# Altium PCB 风扇_V1.9.PcbDoc
Units mm, origin at the board's own origin, x right, y up, seen from the top; angles counter-clockwise.
Board outline 21 x 121 mm, 2 copper layers (Top Layer, Bottom Layer); 73 components, 53 nets, 228 pads, 116 vias.
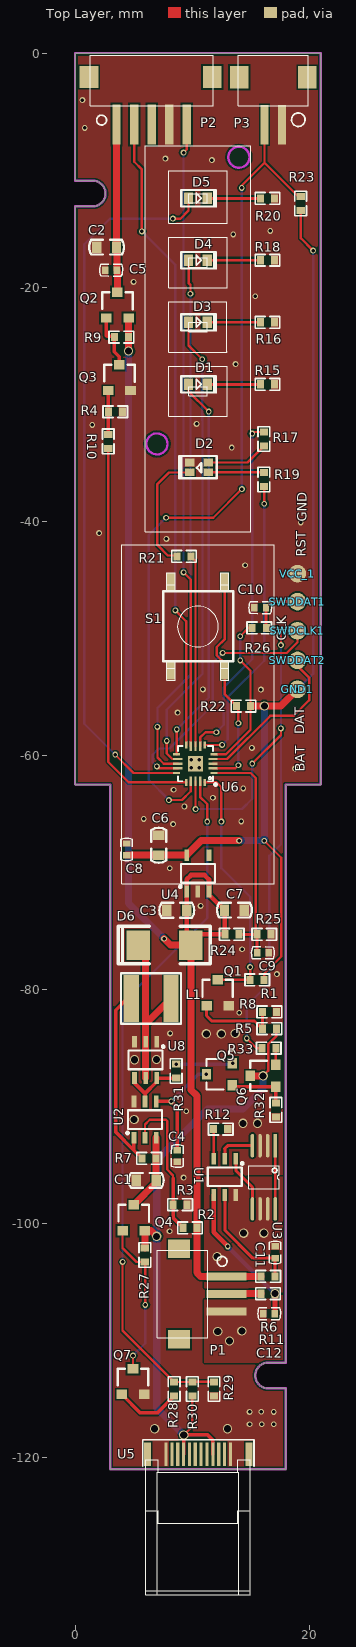
[diagram p0: Top Layer view]
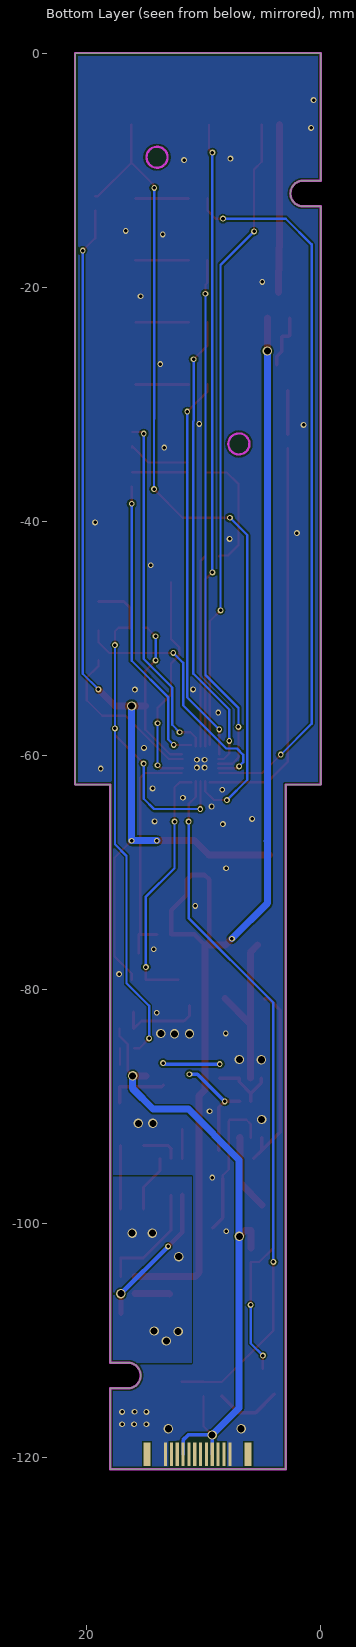
[diagram p1: Bottom Layer view, seen from below]

## Layer stack, top to bottom
Top Layer: signal copper 0.0356
Dielectric: dielectric 0.32, FR-4, Dk 4.8
Bottom Layer: signal copper 0.0356

## Board outline
0,-62.5 0,-13.1 1.5,-13.1 ccw(c1.5,-12) 1.5,-10.9 0,-10.9 0,0 21,0 21,-62.5 18,-62.5 18,-111.9 16.5,-111.9 ccw(c16.5,-113) 16.5,-114.1 18,-114.1 18,-121 3,-121 3,-62.5

## Design rules (kind name [scope] priority, off if disabled: settings)
Clearance [All] p1: gap=0.15
FabricationTestPointUsage TestPointUsage [All] p1: valid=0 allowmultiple=FALSE
FabricationTestpoint Testpoint [(IsPad And (OnTopLayer Or OnBottomLayer))] p1: side=3 testpointundercomponent=TRUE minsize=1.016 maxsize=2.54 preferedsize=1.524 minholesize=0 maxholesize=1.016 preferedholesize=0.813 testpointgrid=0.025 allowsidetop=TRUE allowsidebottom=TRUE usegrid=TRUE gridtolerance=0
PlaneConnect [All] p1: planeconnectstyle=Direct reliefexpansion=0.508 reliefentries=4 reliefconductorwidth=0.254 reliefairgap=0.254
PolygonConnect [All] p1: connectstyle=Direct reliefconductorwidth=0.254 reliefentries=4 polygonreliefangle="90 Angle"
RoutingVias [All] p1: holewidth=0.3 width=0.5 viastyle="Through Hole" minholewidth=0.3 minwidth=0.5 maxholewidth=0.711 maxwidth=1.27
SilkscreenOverComponentPads [All] p1: minsilkscreentomaskgap=0.254
SolderMaskExpansion [All] p1: expansion=0.102
Width [All] p1: maxlimit=1 minlimit=0.15 preferedwidth=0.254
24 further rules are at their usual default settings.

## Components (designator, comment, footprint, x,y, rotation, side; value= is the part's Value field where it differs from the comment)
C1 "47uF" C-0603 6.078,-96.324 r180 top
C2 "22uF" C-0603 2.692,-16.589 r0 top
C3 "47uF" C-0603 8.689,-73.246 r0 top
C4 "4.7uF" C-0402 8.738,-94.237 r270 top
C5 "1uF" C-0402 3.073,-18.55 r0 top
C6 "22uF" C-0603 7.15,-67.691 r270 top
C7 "22uF" C-0603 13.619,-73.233 r180 top
C8 "1uF" C-0402 4.402,-68.039 r270 top
C9 "1uF" C-0402 16.06,-76.881 r180 top
C10 "0.1uF" C-0402 15.811,-47.391 r0 top
C11 "1uF" C-0402 17.092,-102.474 r270 top
C12 "1uF" C-0402 16.576,-107.729 r0 top
D1 "LED0" LED-0603 11.857,-28.984 r180 top
D2 "RGB-GND" 0603*2-LED 9.794,-35.834 r0 top
D3 "LED0" LED-0603 11.857,-23.684 r180 top
D4 "LED0" LED-0603 11.857,-18.384 r180 top
D5 "LED0" LED-0603 11.857,-13.084 r180 top
D6 "SS34" DSMD 9.898,-76.225 r180 top
GND1 "TP" TP-1.5 19.002,-54.369 r90 top
L1 "10uH" L-SMD 6.495,-80.772 r180 top
P1 "TU1501WNR-3PS-VOID-C0-NL-A" TU1501WNR-3PS-VOID-*-NL-A 11.318,-102.284 r270 top
P2 "TU1501WNR-5PS-VOID-C0-NL-A" TU1501WNR-5PS-VOID-*-NL-A 1.3,-4.483 r0 top
P3 "TU1501WNR-2PS-VOID-C0-NL-A" TU1501WNR-2PS-VOID-*-NL-A 19.939,-4.501 r180 top
Q1 "8050" SOT-23 12.183,-79.195 r0 top
Q2 "BM2301" SOT-23 3.62,-20.439 r0 top
Q3 "8050" SOT-23 3.787,-26.638 r0 top
Q4 "BM2301" SOT-23 5.014,-98.417 r0 top
Q5 "8550" SOT-23 11.227,-87.259 r90 top
Q6 "8050" SOT-23 14.958,-87.391 r90 top
Q7 "8050" SOT-23 4.95,-112.415 r0 top
R1 "10K" R-0402 15.436,-79.197 r0 top
R2 "60K" R-0402 9.944,-100.381 r180 top
R3 "10K" R-0402 8.847,-98.407 r0 top
R4 "10K" R-0402 3.564,-30.651 r180 top
R5 "1K" R-0402 16.728,-83.368 r180 top
R6 "330R" R-0402 16.624,-104.539 r180 top
R7 "60mR" R-0402 6.2,-94.45 r0 top
R8 "1K" R-0402 16.474,-81.928 r0 top
R9 "470K" R-0402 3.833,-24.272 r0 top
R10 "4.7K" R-0402 2.837,-33.304 r90 top
R11 "330R" R-0402 16.609,-106.009 r180 top
R12 "2K" R-0402 12.573,-91.948 r180 top
R15 "500R" R-0402 16.309,-28.304 r0 top
R16 "500R" R-0402 16.309,-23.004 r0 top
R17 "500R" R-0402 16.142,-32.855 r270 top
R18 "500R" R-0402 16.309,-17.704 r0 top
R19 "500R" R-0402 16.142,-36.558 r90 top
R20 "500R" R-0402 16.309,-12.418 r0 top
R21 "500R" R-0402 9.428,-43.012 r180 top
R22 "47K" R-0402 14.265,-55.799 r0 top
R23 "47K" R-0402 19.279,-12.72 r270 top
R24 "1M" R-0402 13.264,-75.301 r0 top
R25 "500K" R-0402 16.035,-75.301 r0 top
R26 "47K" R-0402 15.864,-49.119 r180 top
R27 "10k" R-0402 5.961,-102.824 r90 top
R28 "10K" R-0402 8.461,-114.28 r90 top
R29 "20k" R-0402 11.872,-114.021 r270 top
R30 "10K" R-0402 10.025,-114.28 r90 top
R31 "10K" R-0402 8.639,-87.112 r90 top
R32 "10K" R-0402 17.165,-90.432 r90 top
R33 "10K" R-0402 16.429,-85.029 r0 top
S1 "SW-PB" SWITCH-4P-SMT 13.525,-45.975 r270 top
SWDCLK1 "TP" TP-1.5 19.002,-49.362 r90 top
SWDDAT1 "TP" TP-1.5 19.002,-46.868 r90 top
SWDDAT2 "TP" TP-1.5 19.002,-51.897 r90 top
U1 "HY2120-CB" SOT-23-6L 12.791,-96.022 r180 top
U2 "HM4033" SOT-23-6L 5.979,-91.135 r0 top
U3 "8205A" TSSOP8 17.104,-93.363 r270 top
U4 "TPS76033" SOT-23-5 10.493,-70.086 r0 top
U5 "USB Type-C" "USB-type C" 10.523,-119.72 r0 top
U6 "N76E003AQ20" "QFN-20 0.4mm" 10.286,-60.719 r90 top
U8 "HM8205-6" SOT-23-6L 6.03,-86.035 r180 top
VCC_1 "TP" TP-1.5 19.002,-44.486 r90 top

## Footprints (in the part's own frame and the unit in brackets; to place one, negate y for a bottom-side part, rotate by r counter-clockwise, add the part's x,y. Pads: shape width x height; smd on the part's side, far side on the other; paste and mask are expansions set on the pad)
0603*2-LED [mm]
  rect 0.8x0.65 smd: 1(1.6,0.85) 2(1.6,0) 3(0,0) 4(0,0.85)
  silkscreen extent -0.9,-0.5 2.3,1.4
C-0402 [mm]
  rect 0.55x0.65 smd: 1(-0.5,0) 2(0.5,0)
  Top Layer pour cut-out: -0.228,0.419 -0.228,-0.419 0.229,-0.419 0.216,-0.406 0.216,0.419
  silkscreen extent -0.96,-0.5 0.99,0.5
C-0603 [mm]
  rect 0.8x1 smd: 1(-0.85,0) 2(0.85,0)
  silkscreen extent -1.49,-0.63 1.49,0.63
DSMD [mm]
  rect 2x2.54 smd: 1(0,0) 3(4.5,0)
  silkscreen extent -1.65,-1.6 6.22,1.6
L-SMD [mm]
  rect 1.3x4 smd: 1(1.692,0.016) 2(-1.708,0.016)
  silkscreen extent -2.57,-2.14 2.56,2.17
LED-0603 [mm]
  rect 0.8x1 smd: 1(2.17,-0.68) 2(0.57,-0.68)
  silkscreen extent -0.19,-1.38 2.77,0.02
"QFN-20 0.4mm" [mm]
  rect 0.2x0.6 smd: 1(-0.8,-1.6) 5(0.8,-1.6) 11(0.8,1.6) 15(-0.8,1.6)
  rect 0.2x0.8 smd: 2(-0.4,-1.5) 3(0,-1.5) 4(0.4,-1.5) 12(0.4,1.5) 13(0,1.5) 14(-0.4,1.5)
  rect 0.6x0.2 smd: 6(1.6,-0.8) 10(1.6,0.8) 16(-1.6,0.8) 20(-1.6,-0.8)
  rect 0.8x0.2 smd: 7(1.5,-0.4) 8(1.5,0) 9(1.5,0.4) 17(-1.5,0.4) 18(-1.5,0) 19(-1.5,-0.4)
  rect 1.3x1.3 smd: 21(0,0)
  silkscreen extent -1.88,-1.82 1.5,1.5
R-0402 [mm]
  rect 0.6x0.7 smd: 1(-0.473,0) 2(0.727,0)
  Top Layer pour cut-out: -0.178,0.445 -0.178,-0.445 0.432,-0.445 0.432,0.445
  silkscreen extent -0.92,-0.5 1.18,0.5
SOT-23 [mm]
  rect 0.9x0.8 smd: 1(-0.95,-2.2) 2(0.95,-2.2) 3(0,0)
  silkscreen extent -1.3,-1.44 1.3,0
SOT-23-5 [mm]
  rect 0.4x1 smd: 1(-0.95,-1.55) 2(0,-1.55) 3(0.95,-1.55) 4(0.95,1.55) 5(-0.95,1.55)
  silkscreen extent -1.6,-1.24 1.45,0.8
SOT-23-6L [mm]
  rect 0.4x1 smd: 1(-0.95,-1.55) 2(0,-1.55) 3(0.95,-1.55) 4(0.95,1.55) 5(0,1.55) 6(-0.95,1.55)
  silkscreen extent -1.6,-1.24 1.45,0.8
SWITCH-4P-SMT [mm]
  rect 1.55x0.7 smd: 1(-0.775,-0.725) 1(6.775,-0.725) 2(-0.775,-5.325) 2(6.775,-5.325)
  silkscreen extent 0,-6 6,0
TP-1.5 [mm]
  round 1.5 smd: 1(0,0)
TSSOP8 [mm]
  rect 2x0.3 smd: 1(0,0)
  oval 2x0.3 smd: 2(0,-0.65) 3(0,-1.3) 4(0,-1.95) 5(5.4,-1.95) 6(5.4,-1.3) 7(5.4,-0.65) 8(5.4,0)
  silkscreen extent 1.74,-2.28 3.66,0.33
TU1501WNR-2PS-VOID-*-NL-A [mm]
  rect 0.7x3.4 smd: 1(2.25,1.62) 2(3.75,1.62)
  rect 1.6x1.9 smd: 3(0.11,-2.438) 4(5.9,-2.438)
  silkscreen extent 0,-4.32 6,1.77
TU1501WNR-3PS-VOID-*-NL-A [mm]
  rect 0.7x3.4 smd: 1(2.25,1.62) 2(3.75,1.62) 3(5.25,1.62)
  rect 1.6x1.9 smd: 4(-0.11,-2.438) 5(7.62,-2.438)
  silkscreen extent 0,-4.3 7.49,1.66
TU1501WNR-5PS-VOID-*-NL-A [mm]
  rect 0.7x3.4 smd: 1(2.25,-1.62) 2(3.75,-1.62) 3(5.25,-1.62) 4(6.75,-1.62) 5(8.25,-1.62)
  rect 1.6x1.9 smd: 6(-0.11,2.438) 7(10.43,2.438)
  silkscreen extent 0,-1.66 10.5,4.3
"USB-type C" [mm]
  rect 0.27x2 smd: 1(-2.75,0) 2(-2.25,0) 3(-1.75,0) 4(-1.25,0) 5(-0.75,0) 6(-0.25,0) 7(0.25,0) 8(0.75,0) 9(1.25,0) 10(1.75,0) 11(2.25,0) 12(2.75,0)
  rect 0.27x2 smd far side: 13(2.75,0) 14(2.25,0) 15(1.75,0) 16(1.25,0) 17(0.75,0) 18(0.25,0) 19(-0.25,0) 20(-0.75,0) 21(-1.25,0) 22(-1.75,0) 23(-2.25,0) 24(-2.75,0)
  rect 0.6x2 smd: ""(-4.32,0) ""(4.32,0)
  rect 0.6x2 smd far side: ""(-4.32,0) ""(4.32,0)
  silkscreen extent -4.73,-1.03 4.76,1.22

## Part data
C1 C2 C3 C4 C5 C6 C7 C8 C9 C10 C11 C12: library part Cap, "Capacitor"
D1 D3 D4 D5: "Typical INFRARED GaAs LED"
D6: library part "Diode 10TQ035", "Schottky Rectifier"
L1: library part Inductor, "Inductor"
Q1 Q3 Q6 Q7: library part NPN, "NPN Bipolar Transistor"
Q2 Q4: library part PMOS-2, "P-Channel Power MOSFET"
Q5: library part PNP, "PNP Bipolar Transistor"
R1 R2 R3 R4 R5 R6 R7 R8 R9 R10 R11 R12 R15 R16 R17 R18 R19 R20 R21 R22 R23 R24 R25 R26 R27 R28 R29 R30 R31 R32 R33: library part Res1, "Resistor"
S1: "Switch"
U1: library part HY2120

## Via types
v1: diameter 0.5, hole 0.3, Top Layer to Bottom Layer, tented both sides, 94 vias
v2: diameter 0.8, hole 0.6, Top Layer to Bottom Layer, tented both sides, 22 vias

## Nets (pads, with @x,y where several pads share a name; then routed paths per layer and width w, separated by ;. In a path a pad name is that pad's centre, name@x,y a point inside that pad or via, vN(x,y) a via of type N, cw(c..) or ccw(c..) an arc to the next point about the centre after c; other vN are vias at no path point)
5V: Q4.2 Q6.3 R5.1 R27.2 R30.1 U5.4 U5.9 U5.16 U5.21 | length 60.1
  Top Layer w0.2: v2(9.286,-118.08) 10.025,-117.341 R30.1 ; v2@16.066,-87.391 16.508,-86.949 16.508,-84.673 17.201,-83.98 R5.1
  Top Layer w0.3: U5.4 U5.4@9.273,-119.707 ; U5.4@9.286,-119.707 v2(9.286,-118.08) 11.34,-118.08 11.773,-118.514 U5.9
  Top Layer w0.6: R27.2 5.964,-102.095 Q4.2 6.473,-100.617 v2(6.97,-101.114) ; Q6.3 16.066,-87.391 v2(16.075,-87.4)
  Bottom Layer w0.3: U5.21 v2@9.273,-118.093 ; v2(9.286,-118.08) 11.34,-118.08 11.773,-118.514 U5.16
  Bottom Layer w0.6: v2(9.286,-118.08) 6.98,-115.774 6.98,-94.58 11.32,-90.24 14.33,-90.24 16.075,-88.495 v2(16.075,-87.4)
BAT: C3.2 C7.2 D6.1 P1.1 Q2.2 R2.1 R6.2 R9.2 R24.1 U4.1 U4.3 | length 107.1
  Top Layer w0.4: D6.1@9.539,-75.866 D6.1 10.823,-75.301 R24.1 12.791,-73.255 11.443,-71.907 U4.3 11.443,-70.623 11.06,-70.24 9.91,-70.24 9.543,-70.607 U4.1 9.543,-73.243 C3.2 D6.1@9.539,-75.866
  Top Layer w0.6: v2(4.57,-25.46) Q2.2 ; v1(7.6,-75.675) 8.15,-76.225 D6.1 9.916,-76.243 9.916,-88.596 10.417,-89.097 R2.1 10.417,-104.219 10.732,-104.534 P1.1 15.893,-104.534 R6.2
  Bottom Layer w0.6: v2(4.57,-25.46) 4.57,-67.314 ; 4.58,-67.324 4.57,-67.314 ; v1(7.6,-75.675) 4.57,-72.645 4.57,-67.314
BAT-: C11.1 C12.1 P1.3 U1.6 U3.6 U3.7
  other v2: 13.2,-110.05 12.192,-109.245 14.249,-109.195 12.141,-102.845 14.402,-100.838 16.129,-100.838
BAT_ADC: C9.2 R24.2 R25.1 U6.1 | length 20.3
  Top Layer w0.2: U6.1 15.019,-61.519 15.439,-61.939 15.439,-75.178 R25.1
  Top Layer w0.254: R24.2@13.993,-75.303 15.56,-75.303 C9.2
CHARGING_VIN: C1.1 Q4.3 R7.2 U2.3 | length 6.5
  Top Layer w0.6: Q4.3 6.928,-96.503 C1.1 C1.1 R7.2 6.927,-92.687 U2.3
CLK: SWDCLK1.1 U6.14 | length 22.5
  Top Layer w0.2: v1(6.99,-60.95) 7.159,-61.119 U6.14 ; v1(12.61,-51.26) 18.08,-51.26 19.002,-50.338 SWDCLK1.1
  Bottom Layer w0.2: v1(6.99,-60.95) 6.64,-60.6 6.64,-59.95 7.17,-59.42 8.08,-59.42 11.77,-55.73 11.77,-52.1 v1(12.61,-51.26)
D6_1: D6.3 L1.2 U8.2 U8.5 | length 14.7
  Top Layer w0.6: D6.3 6.03,-76.857 6.03,-82.961 ; U8.5 U8.2 6.03,-82.961 ; L1.2 6.03,-82.961
DAT: SWDDAT2.1 U6.4 | length 14.1
  Top Layer w0.2: U6.4 12.991,-60.319 16.69,-56.62 18.68,-56.62 20.002,-55.298 20.002,-53.369 19.002,-52.369 SWDDAT2.1
DRV: R31.1 U2.5 U8.4 U8.6 | length 5.8
  Top Layer w0.3: U8.4 5.08,-88.005 5.979,-88.904 ; U2.5 5.979,-88.904 ; R31.1 U8.6 6.98,-87.903 5.979,-88.904
FB: R2.2 R3.1 U2.2 | length 12.9
  Top Layer w0.2: U2.2 5.979,-91.546 6.375,-91.15 7.775,-91.15 7.875,-91.25 7.875,-95.4 8.374,-95.899 8.374,-96.138
  Top Layer w0.3: 8.374,-96.138 8.374,-99.538 R2.2
GND: C1.2 C2.1 C3.1 C4.2 C5.1 C6.1 C7.1 C8.1 C9.1 C10.1 D2.4 P2.4 P3.1 Q1.2 Q3.2 Q7.2 R3.2 R4.1 R8.2 R12.1 R15.2 R16.2 R18.2 R20.2 R25.2 R29.2 R32.1 S1.2 U2.6 U3.2 U3.3 U4.2 U5.1 U5.12 U5.13 U5.24 U6.3 U6.21 U8.1 U8.3 VCC_1.1
  other v1: 14.91,-117.17 15.951,-117.17 16.98,-117.17 14.91,-116.11 15.91,-116.1 16.98,-116.11 8.08,-100.67 9.28,-96.084 9.5,-90.425 8.125,-83.775 14.025,-82 17.24,-78.7 14.275,-76.575 10.725,-72.875 8.09,-69.66 8.37,-65.89 14.2,-65.66 5.87,-65.44 9.34,-64.38 11.782,-63.628 8.42,-62.95 14.37,-62.83 18.8,-61.14 9.94,-61.06 10.59,-61.06 9.94,-60.38 10.59,-60.38 15.11,-59.37 8.76,-56.36 15.88,-54.39 10.92,-54.37 14.53,-43.76 7.8,-41.51 2.05,-41.01 19.29,-40.1 13.386,-33.706 1.473,-31.775 10.39,-31.69 13.72,-26.58 15.4,-20.775 5.004,-19.558 13.51,-15.49 16.675,-15.2 11.69,-9.14 7.72,-9.02 0.83,-6.4 0.62,-4.02
  other v2: 6.807,-117.551 13.03,-117.551 14.35,-91.45 15.59,-91.45 5.05,-91.125 5.08,-86.019 6.96,-85.999 11.22,-83.8 12.5,-83.8 13.675,-83.775
IP-: C2.2 C5.2 P2.1 Q2.3 | length 14.4
  Top Layer w0.6: P2.1 3.542,-6.111 C2.2 3.574,-16.62 C5.2 3.62,-18.596 Q2.3
KEY: R22.1 S1.1 U6.2 | length 19
  Top Layer w0.2: U6.2 13.691,-61.119 v1(13.95,-60.86) ; S1.1@12.8,-45.2 12.8,-50.07 12.11,-50.76 12.11,-51.467 12.8,-52.157 12.8,-52.75 12.8,-54.807 R22.1 13.95,-55.957 v1(13.95,-57.27)
  Bottom Layer w0.2: v1(13.95,-60.86) v1(13.95,-57.27)
KEY_TOP: P3.2 R23.1 U6.17 | length 72.2
  Top Layer w0.2: v1(7.772,-39.7) 11.811,-39.7 v1(14.249,-37.262) ; v1(8.02,-63.83) 9.13,-63.83 9.886,-63.074 U6.17 ; v1(14.24,-11.525) 14.24,-11.313 16.189,-9.364 ; P3.2@16.197,-6.129 P3.2 16.189,-9.364 ; R23.1 19.072,-12.247 16.189,-9.364
  Bottom Layer w0.2: v1(7.772,-39.7) 6.29,-41.183 6.29,-62.1 v1(8.02,-63.83) ; 14.24,-31.27 v1(14.24,-11.525) ; v1(14.249,-37.262) 14.249,-31.279
LED1: D1.1 U6.11 | length 33.5
  Top Layer w0.2: U6.11 v1(8.686,-57.796) ; D1.1 9.687,-28.907 v1(11.42,-30.64)
  Bottom Layer w0.2: v1(8.686,-57.796) 11.42,-55.061 v1(11.42,-30.64)
LED2: D3.1 U6.12 | length 39.8
  Top Layer w0.2: v1(7.83,-58.77) 7.83,-59.85 8.299,-60.319 U6.12 ; D3.1 9.687,-24.977 v1(10.87,-26.16)
  Bottom Layer w0.2: v1(7.83,-58.77) 7.83,-56.1 10.89,-53.04 10.89,-31.463 10.87,-31.443 v1(10.87,-26.16)
LED3: D4.1 U6.13 | length 45.7
  Top Layer w0.2: v1(7.04,-57.58) 7.04,-60.19 7.569,-60.719 U6.13 ; D4.1 9.7,-17.717 9.7,-19.65 9.86,-19.81 v1(9.86,-20.57)
  Bottom Layer w0.2: v1(7.04,-57.58) 7.04,-55.97 9.86,-53.15 v1(9.86,-20.57)
LED4: D5.1 U6.15 | length 61.8
  Top Layer w0.2: v1(3.43,-59.95) 4.999,-61.519 U6.15 ; v1(8.36,-14.15) 9,-14.15 9.687,-13.463 D5.1
  Bottom Layer w0.2: v1(3.43,-59.95) 0.79,-57.31 0.79,-16.35 2.99,-14.15 v1(8.36,-14.15)
LED_B: R17.1 U6.7 | length 30.2
  Top Layer w0.2: U6.7 10.686,-58.484 11.14,-58.03 v1(12.07,-58.03) ; v1(15.137,-32.517) 15.273,-32.382 R17.1
  Bottom Layer w0.2: v1(12.07,-58.03) 12.7,-57.4 12.7,-54.207 15.137,-51.77 v1(15.137,-32.517)
LED_G: R19.1 U6.6 | length 25.1
  Top Layer w0.2: U6.6 v1(12.569,-59.119) ; R19.1 16.16,-37.05 v1(16.16,-38.51)
  Bottom Layer w0.2: v1(12.569,-59.119) 13.05,-58.639 13.05,-55.03 16.16,-51.92 v1(16.16,-38.51)
LED_R: R21.1 U6.8 | length 16.4
  Top Layer w0.2: R21.1 10.286,-43.396 U6.8
M_CW: R28.2 R29.1 R30.2 U6.19 | length 59.8
  Top Layer w0.2: v1(4.054,-103.297) 4.054,-109.146 R28.2 R30.2 10.03,-113.548 R29.1 ; U6.19 10.686,-63.561 11.3,-64.175 v1(11.3,-65.675)
  Bottom Layer w0.2: v1(4.054,-103.297) 4.054,-81.146 11.3,-73.9 v1(11.3,-65.675)
M_FG: P2.2 U6.10 | length 54.9
  Top Layer w0.2: P2.2 5.05,-9.28 5.71,-9.94 v1(5.71,-15.24) ; v1(8.57,-47.63) 9.486,-48.546 U6.10
  Bottom Layer w0.2: v1(5.71,-15.24) 8.57,-18.1 v1(8.57,-47.63)
M_GND: P1.2 R11.2 | length 3
  Top Layer w0.6: P1.2 12.962,-106.009 R11.2
M_PWM: P2.5 U6.9 | length 53.5
  Top Layer w0.2: v1(9.27,-44.37) 9.886,-44.986 U6.9 ; v1(9.27,-8.51) 9.55,-8.23 P2.5
  Bottom Layer w0.2: v1(9.27,-44.37) v1(9.27,-8.51)
NetC11_2: C11.2 R6.1 U1.5 | length 9.9
  Top Layer w0.254: U1.5 12.791,-100.574 15.192,-102.974 C11.2 17.097,-102.98 R6.1
NetC12_2: C12.2 R11.1 U1.4 | length 12.3
  Top Layer w0.254: R11.1@17.076,-106.015 v2(17.082,-106.009)
  Top Layer w0.4: U1.4 11.841,-100.766 v1(13.05,-101.975) ; C12.2 R11.1@17.076,-106.015
  Bottom Layer w0.4: v1(13.05,-101.975) 13.05,-101.977 v2(17.082,-106.009)
NetD1_2: D1.2 R15.1 | length 4.5
  Top Layer w0.254: D1.2 R15.1
NetD2_1: D2.1 R17.2 | length 5.5
  Top Layer w0.2: D2.1 14.739,-34.984 R17.2 R17.2@16.142,-33.738
NetD2_2: D2.2 R19.2 | length 4.7
  Top Layer w0.2: D2.2 11.397,-35.831 R19.2
NetD2_3: D2.3 R21.2 | length 10.5
  Top Layer w0.2: R21.2@8.6,-42.911 R21.2@8.615,-42.926 ; R21.2 R21.2@8.615,-42.926 ; D2.3 8.031,-35.834 7.036,-36.83 7.036,-42.037 7.925,-42.926 R21.2@8.615,-42.926
NetD3_2: D3.2 R16.1 | length 4.5
  Top Layer w0.2: D3.2 R16.1
NetD4_2: D4.2 R18.1 | length 4.5
  Top Layer w0.254: D4.2 R18.1
NetD5_2: D5.2 R20.1 | length 4.5
  Top Layer w0.254: D5.2@11.301,-12.418 R20.1
NetL1_1: L1.1 R7.1 U2.1 | length 16.4
  Top Layer w0.3: L1.1 4.462,-80.788 3.475,-81.775 3.475,-92.198 5.029,-93.752 ; U2.1 5.029,-93.752 ; R7.1 5.029,-93.752
NetP2_3: P2.3
NetQ1_1: Q1.1 R5.2 R8.1 | length 7.5
  Top Layer w0.254: Q1.1 11.233,-82.258 11.675,-82.7 15.334,-82.7 R5.2 R8.1
NetQ2_1: Q2.1 Q3.3 R9.1 | length 4.8
  Top Layer w0.3: Q2.1 2.67,-24.133 2.743,-24.206 3.294,-24.206 R9.1 3.36,-25.509 3.787,-25.936 Q3.3
NetQ3_1: Q3.1 R4.2 R10.2 | length 3.7
  Top Layer w0.3: R10.2 R4.2 Q3.1
NetQ4_1: Q4.1 Q7.3 R27.1 | length 13.5
  Top Layer w0.2: Q4.1 4.054,-100.628 4.054,-102.097 5.254,-103.297 R27.1 6,-103.336 v1(6,-106.975) ; Q7.3 v1@4.95,-111.3
  Bottom Layer w0.2: v1(4.95,-111.3) 6,-110.25 v1(6,-106.975)
NetQ5_1: Q5.1 Q6.1 R32.2 | length 5.1
  Top Layer w0.3: Q5.1@13.477,-88.209 13.609,-88.341 Q6.1 17.165,-88.348 R32.2
NetQ5_2: Q5.2 R31.2 | length 4.9
  Bottom Layer w0.3: v1(8.639,-86.385) 13.401,-86.385 v1(13.477,-86.309)
NetQ6_2: Q6.2 R33.2 | length 1.4
  Top Layer w0.2: R33.2 17.158,-85.031 Q6.2
NetQ7_1: Q7.1 R28.1 | length 5.7
  Top Layer w0.3: Q7.1 5.585,-116.2 7.013,-116.2 R28.1
NetR12_2: R12.2 U1.3 | length 2.5
  Top Layer w0.2: U1.3 11.841,-91.953 R12.2
NetU3_1: U3.1 U3.8 | length 5.4
  Top Layer w0.254: U3.8 U3.1
OC: U1.2 U3.4 | length 3.3
  Top Layer w0.254: U1.2 12.791,-93.64 12.776,-93.624 13.038,-93.363 U3.4
OD: U1.1 U3.5 | length 4.9
  Top Layer w0.254: U1.1 13.741,-95.504 15.154,-96.917 U3.5
RST: C10.2 R26.1 R33.1 SWDDAT1.1 U6.18 | length 58.3
  Top Layer w0.2: U6.18 10.286,-64.586 v1(10.3,-64.6) ; v1(14.675,-84.2) 15.504,-85.029 R33.1 ; v1(15.14,-60.71) 17.59,-58.26 v1(17.59,-57.71) ; R26.1@16.312,-49.093 17.273,-49.093 17.59,-49.41 v1(17.59,-50.59)
  Top Layer w0.254: R26.1 16.312,-49.093 C10.2 16.835,-46.868 SWDDAT1.1
  Bottom Layer w0.2: v1(10.3,-64.6) 14.262,-64.6 15.14,-63.722 v1(15.14,-60.71) ; v1(14.675,-84.2) 14.675,-81.4 16.6,-79.475 16.6,-68.6 17.59,-67.61 v1(17.59,-57.71) v1(17.59,-50.59)
USB_CHECK: Q1.3 R1.1 U6.20 | length 21.9
  Top Layer w0.2: U6.20 12.079,-62.319 12.5,-62.74 v1(12.5,-65.67) ; Q1.3 14.96,-79.195 R1.1 14.963,-78.113 v1(14.95,-78.1)
  Bottom Layer w0.2: v1(12.5,-65.67) 12.5,-69.65 14.975,-72.125 v1@14.975,-78.1
V_MOTOR: R10.1 U6.16 | length 34.2
  Top Layer w0.2: R10.1 2.837,-60.567 4.589,-62.319 U6.16
VCC: C4.1 Q5.3 U2.4 | length 9.7
  Top Layer w0.3: U2.4 v1(8.215,-89.585) 8.225,-89.575 8.738,-90.088 C4.1
  Bottom Layer w0.3: v1(8.215,-89.585) 10.541,-87.259 v1(11.227,-87.259)
VCC_5V: C6.2 C8.2 GND1.1 R1.2 R22.2 R23.2 R26.2 U4.5 U6.5 | length 97.3
  Top Layer w0.2: U6.5 12.891,-59.919 14.992,-57.818 R22.2 ; v1(14.12,-51.9) 14.992,-52.772 R22.2 ; v1(14.12,-49.83) 14.831,-49.119 R26.2 ; R22.2@15.137,-55.653 14.997,-55.793 R22.2 ; R1.2 16.163,-78.662 17.625,-77.2 17.625,-68.755 v1(16.17,-67.3) ; R23.2 19.279,-15.814 v1(20.34,-16.875)
  Top Layer w0.6: C8.2 7.149,-68.539 C6.2 9.538,-68.541 U4.5 10.779,-67.3 v1(14.02,-67.3) ; R22.2@14.997,-55.793 v2(16.17,-55.793) 17.577,-55.793 v1(19.002,-54.369)
  Bottom Layer w0.2: v1(14.12,-51.9) v1(14.12,-49.83) ; v1(19.002,-54.369) 19.011,-54.369 20.34,-53.04 v1(20.34,-16.875)
  Bottom Layer w0.6: v1(14.02,-67.3) v1(16.17,-67.3) v2(16.17,-55.793)
pads on no net: P1.4 P1.5 P2.6 P2.7 P3.3 P3.4 U4.4 U5. U5.2 U5.3 U5.5 U5.6 U5.7 U5.8 U5.10 U5.11 U5.14 U5.15 U5.17 U5.18 U5.19 U5.20 U5.22 U5.23

## Polygon pours and split planes (outlines as drawn)
GND on Top Layer "Top Layer-No Net" (solid, remove dead copper): 0,0 21,0 21,-62.5 18,-62.5 18,-121 3,-121 3,-62.5 0,-62.5 0,0
BAT- on Top Layer "Top Layer-No Net" (solid, remove dead copper, pour order 1000): 18,-111.9 18,-96 11.05,-96 11.05,-111.9 18,-111.9
GND on Bottom Layer "Top Layer-No Net" (solid, remove dead copper): 0,0 21,0 21,-62.5 18,-62.5 18,-121 3,-121 3,-62.5 0,-62.5 0,0
BAT- on Bottom Layer "Top Layer-No Net" (solid, remove dead copper, pour order 1002): 18,-111.9 11.05,-111.9 11.05,-96 18,-96 18,-111.9

## Keep-outs
Keep-Out Layer:
  circle w0.2: c14,-8.9 r0.9
  circle w0.2: c7,-33.4 r0.9
  lines w0.2: 0,-62.5 0,-13.1 1.5,-13.1 ccw(c1.5,-12) 1.5,-10.9 0,-10.9 0,0 21,0 21,-62.5 18,-62.5 18,-111.9 16.5,-111.9 ccw(c16.5,-113) 16.5,-114.1 18,-114.1 18,-121 3,-121 3,-62.5 0,-62.5

## Other copper
Top Layer:
  pour cut-out: 8.786,-62.219 8.786,-59.219 11.786,-59.219 11.786,-62.219

## Silkscreen, mask and mechanical layers (free items; w line width, h text height)
Top Overlay:
  circle w0.05: c10.5,-49 r1.75
  lines w0.05: 6.03,-131.38 14.97,-131.38 ; 6.03,-124.57 7.1,-124.57 7.1,-125.62 ; 7.03,-131.75 7.03,-121.25 13.97,-121.25 13.97,-131.75 ; 7.03,-125.62 13.97,-125.62 ; 7.1,-121.25 7.1,-120.2 6.03,-120.2 6.03,-131.75 14.97,-131.75 14.97,-120.2 ; 7.85,-52.575 8.55,-52.575 ; 7.85,-52.025 7.85,-53.575 8.55,-53.575 8.55,-52.025 ; 7.85,-45.975 7.85,-44.425 8.55,-44.425 8.55,-45.975 ; 7.85,-45.425 8.55,-45.425 ; 12.45,-52.575 13.15,-52.575 ; 12.45,-52.025 12.45,-53.575 13.15,-53.575 13.15,-52.025 ; 12.45,-45.975 12.45,-44.425 13.15,-44.425 13.15,-45.975 ; 12.45,-45.425 13.15,-45.425 ; 13.9,-125.62 13.9,-124.57 14.97,-124.57 ; 13.9,-121.25 13.9,-120.2 14.97,-120.2 ; 7.475,-52.025 13.525,-52.025 13.525,-45.975 7.475,-45.975 7.475,-52.025 ; 9.7,-29.3 9.7,-28.5 11.3,-28.5 11.3,-29.3 9.7,-29.3 ; 9.7,-23.8 9.7,-23 11.3,-23 11.3,-23.8 9.7,-23.8 ; 9.7,-18.3 9.7,-17.5 11.3,-17.5 11.3,-18.3 9.7,-18.3 ; 9.7,-12.8 9.7,-12 11.3,-12 11.3,-12.8 9.7,-12.8
  lines w0.1: 12.96,-25.54 12.97,-25.55 ; 12.96,-21.25 8,-21.25 8,-25.55 12.97,-25.55 ; 12.97,-21.26 12.97,-25.55 ; 4,-71 17,-71 17,-42 4,-42 4,-71 ; 6,-40.9 15,-40.9 15,-7.9 6,-7.9 6,-40.9 ; 8,-31.05 13,-31.05 13,-26.75 8,-26.75 8,-31.05 ; 8,-20.05 13,-20.05 13,-15.75 8,-15.75 8,-20.05 ; 8,-14.55 13,-14.55 13,-10.05 8,-10.05 8,-14.55
  text "GND" at 19.787,-40.056 h0.8 r90
  text "RST" at 19.71,-43.053 h0.8 r90
  text "CLK" at 18.034,-50.216 h0.8 r90
  text "DAT" at 19.583,-58.217 h0.8 r90
  text "BAT" at 19.634,-61.392 h0.8 r90
Mechanical 2:
  lines w0.05: 3,-5.75 9.6,-5.75 9.6,-0.25 3,-0.25 3,-5.75 ; 11.4,-5.75 11.4,-0.25 18,-0.25 18,-5.75 11.4,-5.75

## Dimensions
0,0 to 21,0 on Keep-Out Layer
0,0 to 3,-121 on Keep-Out Layer